# Altium PCB GPS.PcbDoc
Units mil, origin at the board's own origin, x right, y up, seen from the top; angles counter-clockwise.
Board outline 3330 x 1470 mil, 2 copper layers (Top Layer, Bottom Layer); 30 components, 27 nets, 117 pads, 26 vias.
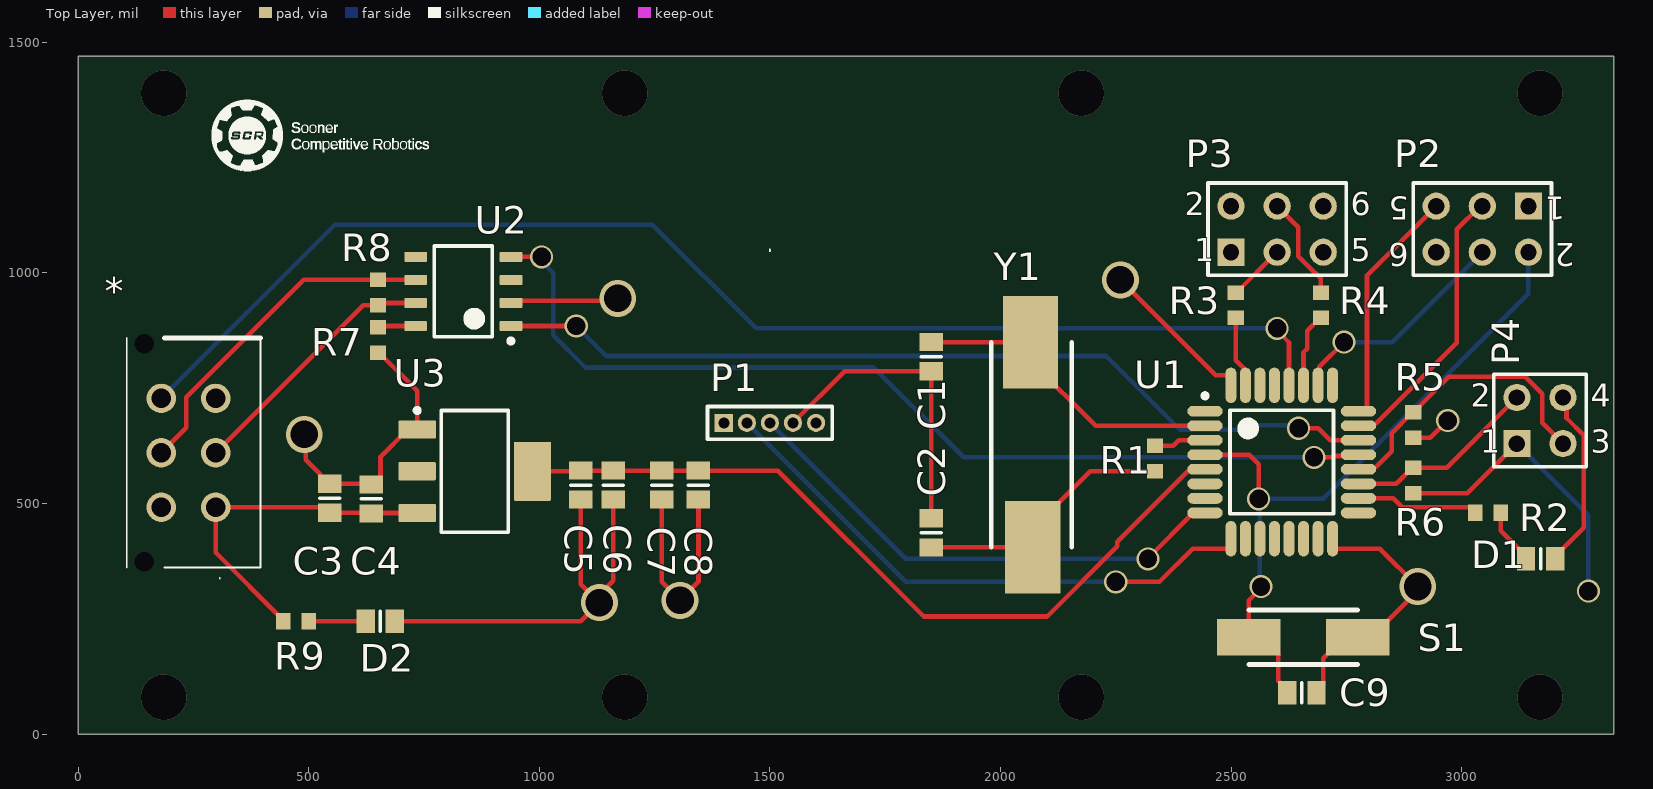
[diagram p0: Top Layer view]
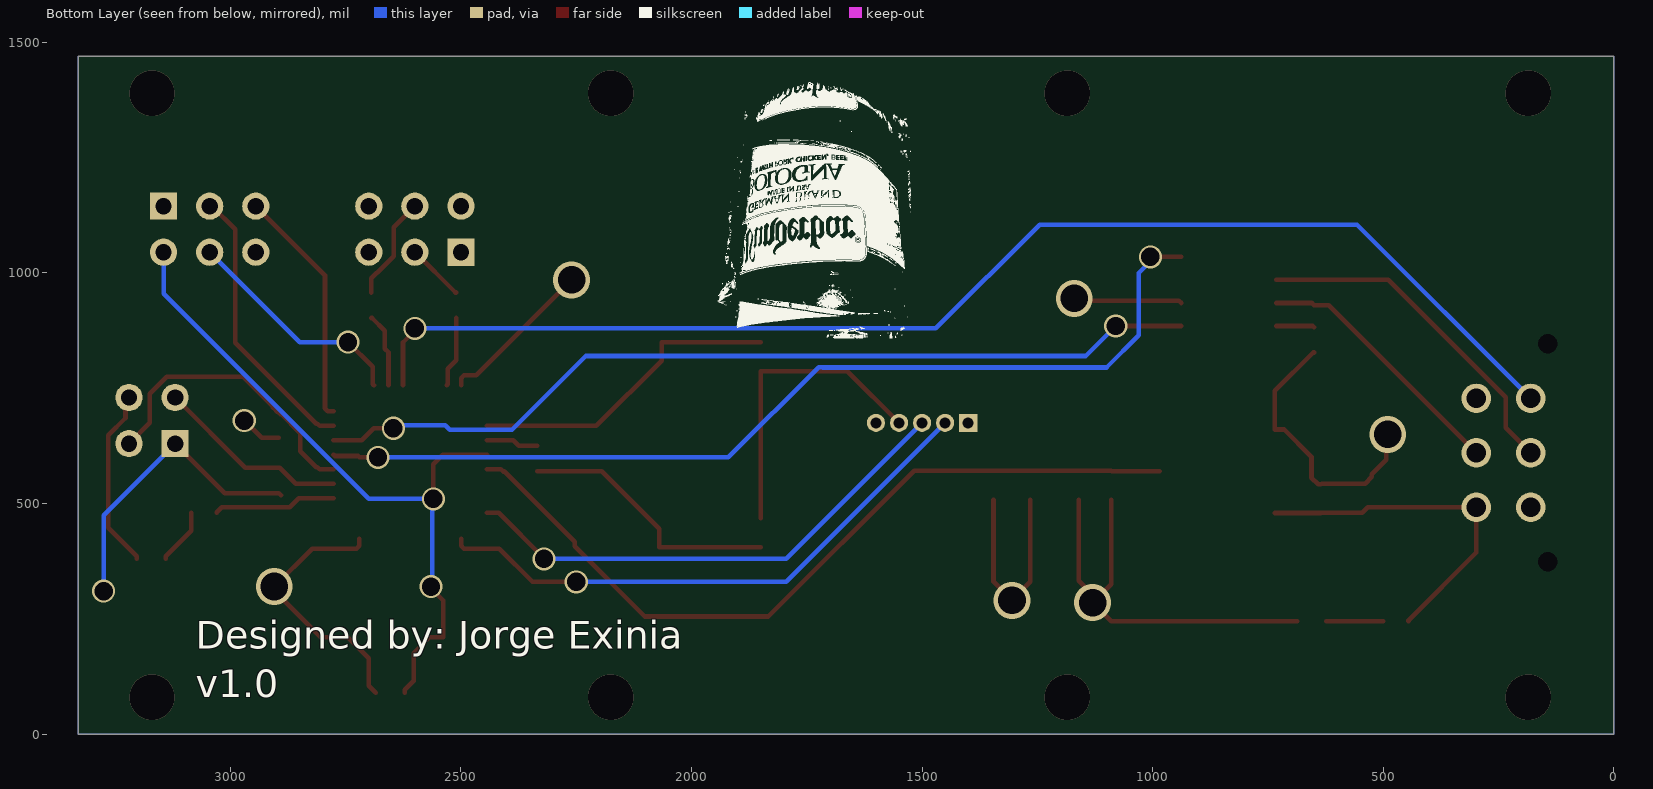
[diagram p1: Bottom Layer view, seen from below]

## Layer stack, top to bottom
Top Solder: solder mask 0.4, Solder Resist, Dk 3.5
Top Layer: signal copper 1.4
Dielectric 1: dielectric 12.6, FR-4, Dk 4.8
Bottom Layer: signal copper 1.4
Bottom Solder: solder mask 0.4, Solder Resist, Dk 3.5

## Board outline
0,0 3330,0 3330,1470 0,1470

## Design rules (kind name [scope] priority, off if disabled: settings)
Clearance [All] p1: gap=10 ignorepadtopadclearanceinfootprint=FALSE except(0: Arc-Hole Track-Hole SMDPad-Hole THPad-Hole Via-Hole Fill-Hole Poly-Hole Region-Hole Text-Hole)
PolygonConnect [All] p1: connectstyle=Relief reliefconductorwidth=10 reliefentries=4 polygonreliefangle="90 Angle" airgapwidth=10
RoutingVias [All] p1: holewidth=28 width=50 viastyle="Through Hole" minholewidth=28 minwidth=50 maxholewidth=28 maxwidth=50
SolderMaskExpansion [All] p1: expansion=4 istentingtop=FALSE
Width [All] p1: maxlimit=10 minlimit=10 preferedwidth=10
30 further rules are at their usual default settings.

## Components (designator, comment, footprint, x,y, rotation, side; value= is the part's Value field where it differs from the comment)
* "Can Molex" "Can Molex-Footprint-1" -451.89,423.11 r90 top
C1 "Cap" 6-0805_L 1850,818.5 r270 top value=50pF
C2 "Cap" 6-0805_L 1850,436.5 r90 top value=50pF
C3 "Cap" 6-0805_L 545,511.5 r270 top value=100nF
C4 "Cap" 6-0805_L 635,510 r270 top value=100uF
C5 "Cap" 6-0805_L 1090,540 r90 top value=330uF
C6 "Cap" 6-0805_L 1160,540 r90 top value=100nF
C7 "Cap" 6-0805_L 1265,540 r90 top value=100nF
C8 "Cap" 6-0805_L 1345,540 r90 top value=100nF
C9 "Cap" 6-0805_L 2653.5,90 r180 top value=0.1UF
D1 "LED1" 6-0805_L 3171.5,380 r0 top
D2 "LED1" 6-0805_L 655,245 r0 top
P1 "MHDR1X5" MHDR1X5 1400,675 r0 top
P2 "MHDR2X3" HDR2X3 3145,1145 r180 top
P3 "2x3 Header" HDR2X3 2500,1045 r0 top
P4 "Header 2X2" HDR2X2 3120,630 r0 top
R1 "Res1" 1608[0603] 2335,597.56 r270 top value=1M
R2 "Res1" 1608[0603] 3057.44,480 r0 top value=510
R3 "Res1" 1608[0603] 2510,930 r270 top value=1K
R4 "Res1" 1608[0603] 2695,930 r270 top value=1K
R5 "Res1" 1608[0603] 2895,670 r90 top value=10k
R6 "Res1" 1608[0603] 2895,550 r270 top value=10k
R7 "Res1" 1608[0603] 650,855 r90 top value=10K
R8 "Res1" 1608[0603] 650,957.56 r270 top value=120
R9 "Res1" 1608[0603] 472.56,245 r0 top value=510
S1 "SW-PB" "Push Switch 3x6x2.5" 2775,210 r180 top
U1 "STM32F334K8T6" STM-LQFP32_M 2610,590 r0 top
U2 "SN65HVD230QDR" D0008A_L 835,960 r180 top
U3 "REG1117-3.3" DCY0004A_M 860,570 r0 top
Y1 "XTAL" "Crystal 11.4 x 4.7 x 4.2 mm" 2105,630 r270 top

## Footprints (in the part's own frame and the unit in brackets; to place one, negate y for a bottom-side part, rotate by r counter-clockwise, add the part's x,y. Pads: shape width x height; smd on the part's side, far side on the other; paste and mask are expansions set on the pad)
6-0805_L [mm] "Chip Resistor, Body 2.0x1.2mm, IPC High Density"
  rect 1x1.3 smd: 1(-0.8,0) 2(0.8,0)
  silkscreen extent 0,-0.55 0,0.55, body extent -1.07,-0.7 1.07,0.7, height 0.7
1608[0603] [mm] "Chip Capacitor, Body 1.6x0.8mm, IPC High Density"
  rect 0.8x0.9 smd: 1(-0.7,0) 2(0.7,0)
  body extent -0.87,-0.48 0.87,0.48, height 1.3
"Can Molex-Footprint-1" [mm]
  round 1.62 hole 1.07: 1(7.747,-19.05) 2(4.747,-19.05) 3(1.747,-19.05) 4(7.747,-16.05) 5(4.747,-16.05) 6(1.747,-16.05)
  round 0.535 hole 1.07 unplated: MH1(10.747,-15.11) MH2(-1.253,-15.11)
  silkscreen extent -2.19,-21.52 11.07,-14.15, body extent -1.77,-21.45 11.38,-12.68, height 9.9
"Crystal 11.4 x 4.7 x 4.2 mm" [mil]
  rect 200x120 smd: 1(-220,-40) 2(225,-35)
  silkscreen extent -220,-125 225,50
D0008A_L [mm] "SOIC, 8-Leads, Body 5x4mm, Pitch 1.27mm, IPC High Density"
  rrect18% 1.25x0.55 smd: 1(-2.625,1.905) 2(-2.625,0.635) 3(-2.625,-0.635) 4(-2.625,-1.905) 5(2.625,-1.905) 6(2.625,-0.635) 7(2.625,0.635) 8(2.625,1.905)
  silkscreen extent -2.75,-2.5 1.6,2.85, body extent -3,-2.45 3,2.45, height 1.63
DCY0004A_M [mm] "SOT223, 4-Leads, Body 6.7x3.7mm, Pitch 2.3mm, IPC Low Density"
  rrect10% 2.05x1 smd: 1(-3.175,2.3) 2(-3.175,0) 3(-3.175,-2.3)
  rrect5% 2.05x3.25 smd: 4(3.175,0)
  silkscreen extent -3.3,-3.35 1.85,3.47, body extent -3.5,-3.25 3.5,3.25, height 1.62
HDR2X2 [mm] "Connector; Header; 2x2 Position"
  rect 1.5x1.5 hole 0.9: 1(0,0)
  round 1.5 hole 0.9: 2(0,2.54) 3(2.54,0) 4(2.54,2.54)
  silkscreen extent -1.27,-1.27 3.81,3.81
HDR2X3 [mm] "Connector; Header; 3x2 Position"
  rect 1.5x1.5 hole 0.9: 1(0,0)
  round 1.5 hole 0.9: 2(0,2.54) 3(2.54,0) 4(2.54,2.54) 5(5.08,0) 6(5.08,2.54)
  silkscreen extent -1.27,-1.27 6.35,3.81
MHDR1X5 [mm] "Connector; Header; 5 Position"
  rect 1x1 hole 0.6: 1(0,0)
  round 1 hole 0.6: 2(1.27,0) 3(2.54,0) 4(3.81,0) 5(5.08,0)
  silkscreen extent -0.9,-0.9 5.98,0.9
"Push Switch 3x6x2.5" [mm]
  rect 3.5x2 smd: 1(0,0) 2(6,0)
  silkscreen extent 0,-1.5 6,1.5
STM-LQFP32_M [mm] "QFP, 32-Leads, Body 7x7mm, Pitch 0.8mm, IPC Low Density"
  oval 1.95x0.6 smd: 1(-4.225,2.8) 2(-4.225,2) 3(-4.225,1.2) 4(-4.225,0.4) 5(-4.225,-0.4) 6(-4.225,-1.2) 7(-4.225,-2) 8(-4.225,-2.8) 17(4.225,-2.8) 18(4.225,-2) 19(4.225,-1.2) 20(4.225,-0.4) 21(4.225,0.4) 22(4.225,1.2) 23(4.225,2) 24(4.225,2.8)
  oval 0.6x1.95 smd: 9(-2.8,-4.225) 10(-2,-4.225) 11(-1.2,-4.225) 12(-0.4,-4.225) 13(0.4,-4.225) 14(1.2,-4.225) 15(2,-4.225) 16(2.8,-4.225) 25(2.8,4.225) 26(2,4.225) 27(1.2,4.225) 28(0.4,4.225) 29(-0.4,4.225) 30(-1.2,4.225) 31(-2,4.225) 32(-2.8,4.225)
  silkscreen extent -4.35,-2.85 2.85,3.77, body extent -3.5,-3.5 3.5,3.5, height 1.6

## Part data
*: library part CMP-001-0001-2, "can molex for IGVC", Datasheet=https://www.mouser.com/datasheet/2/276/0430450612_PCB_HEADERS-142990.pdf, Mouser=https://www.mouser.com/ProductDetail/Molex/43045-0612?qs=KC2ywxza1kqWo9LLJ5Lh3w%3D%3D
C1 C2 C3 C4 C5 C6 C7 C8 C9: "Capacitor", LatestRevisionDate=17-Jul-2002, LatestRevisionNote="Re-released for DXP Platform.", PackageDescription="Radial Cap, Thru-Hole; 2 Leads; 0.3 in Pin Spacing", PackageReference=RAD-0.3, Published=8-Jun-2000, Publisher="Altium Limited"
D1 D2: "Typical RED GaAs LED", LatestRevisionDate=08-Jul-2005, LatestRevisionNote="Mech Layer 1 removed.", PackageDescription="LED; 2 Leads", PackageReference=LED-1, Published=8-Jun-2000, Publisher="Altium Limited"
P1: "Header, 5-Pin", LatestRevisionDate=17-Jul-2002, LatestRevisionNote="Re-released for DXP Platform.", Publisher="Altium Limited"
P2: "Header, 3-Pin, Dual row", LatestRevisionDate=17-Jul-2002, LatestRevisionNote="Re-released for DXP Platform.", Publisher="Altium Limited"
P4: "Header, 2-Pin, Dual row", LatestRevisionDate=17-Jul-2002, LatestRevisionNote="Re-released for DXP Platform.", Publisher="Altium Limited"
R1 R2 R3 R4 R5 R6 R7 R8 R9: "Resistor", LatestRevisionDate=17-Jul-2002, LatestRevisionNote="Re-released for DXP Platform.", PackageDescription="Axial Device, Thru-Hole; 2 Leads; 0.3 in Pin Spacing", PackageReference=AXIAL-0.3, Published=8-Jun-2000, Publisher="Altium Limited"
S1: "Switch", LatestRevisionDate=17-Jul-2002, LatestRevisionNote="Re-released for DXP Platform.", PackageDescription="Switch; 2 Leads", PackageReference=SPST-2, Published=24-Mar-1999, Publisher="Altium Limited"
U1: library part CMP-0537-00074-1, "ARM Cortex-M4 32-bit MCU, 64 KB Flash, 16 KB Internal RAM, 25 I/Os, 32-Pin LQFP, -40 to 85 degC, Tray", I/Os (High Current)=25, Operating Frequency(F) (Processor speed) (MHz)=72, Package Description="32-Pin Low Profile Quad Flat Package, 7 x 7 mm Body, 0.8 mm Pitch", Package Reference=LQFP32, Supply Voltage(Vcc) min (V)=2, ComponentLink1Description="Manufacturer URL", ComponentLink1URL=http://www.st.com/, ComponentLink2Description=Datasheet, ComponentLink2URL=http://www.st.com/st-web-ui/static/active/en/resource/technical/document/datasheet/DM00097745.pdf, Core="ARM Cortex-M4", D/A Converter=3, DatasheetVersion="Rev. 4", FLASH Size (Prog) (kB)=64, Internal RAM Size (kB)=16, Mounting Technology="Surface Mount", Packing=Tray
U2: library part CMP-0315-00033-2, "Automotive Catalog 3.3 V CAN Transceiver, 17 mA, 3.3 V, -40 to 125 degC, 8-pin SOIC (D), Green (RoHS & no Sb/Br)", Drivers Per Package=1, Manufacturer="Texas Instruments", Rating=Catalog, Supply Voltage(s)(V)=3.3, Code_JEDEC=MS-012AA, ComponentLink1Description=Datasheet, ComponentLink1URL=http://www.ti.com/lit/ds/symlink/sn65hvd230.pdf, DatasheetVersion=SLOS346K, Eco-Plan="Green (RoHS & no Sb/Br)", ICC(Max)(mA)=17, Isolated=No, Mounting Technology="Surface Mount", PackageDescription="8-Pin Plastic Small Outline Integrated Circuit, 4.9 x 3.9 mm, Pitch 1.27 mm Pitch", PackageReference=D0008A, PackageVersion="revM, Jun-2011", PartNumber=SN65HVD230QDR, Receivers Per Package=1, SubFamily=CAN, Transient Pulse Protection(V)="-25 to 25"
U3: library part CMP-0395-00549-2, "Single Output LDO, 800 mA, Fixed 3.3 V Output, 3.8 to 15 V Input, with Internal Current Limiting, 4-pin SOT-223 (DCY), -40 to 125 degC, Green (RoHS & no Sb/Br)", Manufacturer="Texas Instruments", Rating=Catalog, Code_JEDEC=TO-261, ComponentLink1Description="Manufacturer URL", ComponentLink1URL=http://www.ti.com/, ComponentLink2Description=Datasheet, ComponentLink2URL=http://www.ti.com/general/docs/lit/getliterature.tsp?genericPartNumber=REG1117-33&fileType=pdf, ComponentLink3Description="Package Specification", ComponentLink3URL=http://www.ti.com/litv/pdf/mpds094a, DatasheetVersion=SBVS001D, Eco-Plan="Green (RoHS & no Sb/Br)", Fixed Output Options(V)=5, Iout(Max)(A)=0.8, Iq(Typ)(mA)=4, Mounting Technology="Surface Mount", PackageDescription="4-Pin Plastic Small Outline, Body 3.5 x 6.5 mm, Pitch 2.3 mm", PackageReference=DCY0004A, PackageVersion=4202506/B, PartNumber=REG1117-3.3, SubFamily="Single Channel LDO", Vdo(Typ)(mV)=1100, Vin(Max)(V)=15, Vin(Min)(V)=3.8, Vout Adj(Max)(V)=3.3, Vout Adj(Min)(V)=3.3
Y1: "Crystal Oscillator", LatestRevisionDate=17-Jul-2002, LatestRevisionNote="Re-released for DXP Platform.", PackageDescription="Crystal, Thru-Hole; 2 Leads; Body 3.1 x 8.2 mm (Dia.xH)", PackageReference=R38, Published=8-Jun-2000, Publisher="Altium Limited"

## Via types
v1: diameter 50, hole 40, Top Layer to Bottom Layer, 12 vias
v2: diameter 98.5, hole 98.5, Top Layer to Bottom Layer, 8 vias
v3: diameter 80, hole 60, Top Layer to Bottom Layer, 6 vias

## Nets (pads, with @x,y where several pads share a name; then routed paths per layer and width w, separated by ;. In a path a pad name is that pad's centre, name@x,y a point inside that pad or via, vN(x,y) a via of type N, cw(c..) or ccw(c..) an arc to the next point about the centre after c; other vN are vias at no path point)
+5: *.3 C3.2 C4.2 R9.1 U3.3 | length 750.6
  Top Layer w10: R9.1 445,246.97 298.11,393.86 *.3 533.11,491.89 C3.2 633.5,480 C4.2 635.94,479.45 U3.3
BOOT0: R3.2 U1.31 | length 154.9
  Top Layer w10: R3.2 2510,810.59 2528.65,791.94 2528.65,758.95 U1.31
BOOT1: R4.2 U1.27 | length 162.9
  Top Layer w10: U1.27 2657.24,827.93 2665,835.69 2665,874.41 2693.03,902.44 R4.2
CAN_RX: U1.21 U2.4 | length 2106.2
  Top Layer w10: U2.4 v1(1005,1035) ; v1(2680,600) 2720,600 2723.14,603.14 2773.73,603.14 U1.21
  Bottom Layer w10: v1(1005,1035) 1005,1025 1030,1000 1030,865 1100,795 1715,795 1715.86,795.86 1724.14,795.86 1920,600 v1(2680,600)
CAN_TX: U1.22 U2.1 | length 1948.9
  Top Layer w10: U2.1 v1(1080,885) ; v1(2646.72,663.28) 2688.79,663.28 2714.83,637.24 U1.22
  Bottom Layer w10: v1(1080,885) 1145,820 2229.38,820 2389.38,660 2524.28,660 2534.28,670 2640,670 v1(2646.72,663.28)
CANH: *.2 R8.2 U2.7 | length 568.2
  Top Layer w10: *.2 618.11,930 R8.2 655,935 U2.7
CANL: *.5 R8.1 U2.6 | length 745.9
  Top Layer w10: *.5 234.49,664.49 234.49,730.8 488.81,985.12 R8.1 650.12,985 U2.6
ESTOP_SIG: *.4 U1.28 | length 2803.6
  Top Layer w10: v1(2600,880) 2600,874.93 2625.75,849.18 U1.28
  Bottom Layer w10: *.4 556.89,1105 1245,1105 1470,880 v1(2600,880)
GND: *.6 C1.2 C2.2 C3.1 C4.1 C5.1 C6.1 C7.1 C8.1 C9.1 D1.2 D2.2 P1.4 P2.6 P3.5 P3.6 P4.4 R5.1 R7.1 S1.1 U1.16 U1.32 U2.2 U3.1 | length 4330.9
  Top Layer w10: v3(490,650) 492.99,647.01 492.99,595 524.41,563.58 524.41,557.68 539.09,542.99 C3.1 633.5,542.99 C4.1 640.91,541.5 655.59,556.18 655.59,601.81 714.33,660.55 U3.1 735,744.41 651.97,827.44 R7.1 ; D2.2 1090,245 v3(1130,285) ; U2.2 943.35,940 1165,940 v3(1170,945) ; C5.1 1090,325 v3(1130,285) ; C6.1 1160,332.78 1130,302.78 v3(1130,285) ; C7.1 1265,330 v3(1305,290) 1345,330 C8.1 ; P1.4 1662.01,787.01 C1.2 C2.2 ; v3(2260,985) 2467.09,777.91 2493.47,777.91 2499.76,771.62 U1.32 ; C9.1 2699.69,104.69 2699.69,164.21 2745.47,210 S1.1 2804.53,210 2905,310.47 v3(2905,320) 2822.91,402.09 2726.53,402.09 2720.24,408.38 U1.16 ; R5.1 2932.44,642.44 v1(2970,680) ; D1.2 3202.99,385.91 3264.53,447.44 3264.53,648.44 3227.5,685.47 3227.5,722.5 P4.4
GPSRX: P1.2 U1.9 | length 1240.4
  Top Layer w10: v1(2250,330) 2344.91,330 2416.99,402.09 2493.47,402.09 2499.76,408.38 U1.9
  Bottom Layer w10: P1.2 1795,330 v1(2250,330)
GPSTX: P1.3 U1.8 | length 1108
  Top Layer w10: v1(2320,380) 2320,381.34 2418.43,479.76 U1.8
  Bottom Layer w10: P1.3 1795,380 v1(2320,380)
NetC1_1: C1.1 U1.2 Y1.1 | length 692.2
  Top Layer w10: C1.1 Y1.1 2065,810 2206.26,668.74 U1.2
NetC2_1: C2.1 R1.2 Y1.2 | length 576.8
  Top Layer w10: C2.1 Y1.2 2070,445 2195,570 R1.2
NetD1_1: D1.1 R2.2 | length 122.8
  Top Layer w10: R2.2 3085,440.91 3140,385.91 D1.1
NetD2_1: D2.1 R9.2 | length 123.4
  Top Layer w10: R9.2 D2.1
NetP3_3: P3.3 R3.1 | length 126.2
  Top Layer w10: R3.1 2511.97,957.56 2599.41,1045 P3.3
NetP3_4: P3.4 R4.1 | length 227.5
  Top Layer w10: P3.4 2645.47,1099.53 2645.47,1036.56 2681.56,1000.47 2682.83,1000.47 2695,988.31 R4.1
NetR1_1: R1.1 U1.3 | length 113.7
  Top Layer w10: R1.1 2374.5,625.12 2386.62,637.24 U1.3
NetR7_2: R7.2 U2.8 | length 82.7
  Top Layer w10: R7.2 652.44,885 U2.8
NRST: C9.2 P2.2 S1.2 U1.4 | length 1544
  Top Layer w10: U1.4 2444.04,605.37 2539.63,605.37 2560,585 v1(2560,510) ; v1(2565,320) 2565,315.87 2538.78,289.65 S1.2 2568.31,210 2602.68,175.63 2602.68,115.24 2622.01,95.91 C9.2
  Bottom Layer w10: v1(2565,320) 2562.5,322.5 2562.5,507.5 v1(2560,510) 2700,510 3145,955 P2.2
PA8: R2.1 U1.18 | length 267
  Top Layer w10: U1.18 2851.5,511.26 2871.07,491.69 3019.13,491.69 3029.88,480.94 R2.1
PA9: P4.2 R6.1 U1.19 | length 421.2
  Top Layer w10: U1.19 2858.23,542.76 2893.03,577.56 R6.1 2967.56,577.56 P4.2
PA10: P4.3 R5.2 U1.20 | length 647.7
  Top Layer w10: U1.20 2806.6,574.25 2811.28,578.94 2814.02,578.94 2848.15,613.07 2848.15,652.68 2889.72,694.25 2891.69,694.25 R5.2 2896.97,697.56 2907.72,708.31 2907.72,710.28 2971.97,774.53 3138.44,774.53 3174.53,738.44 3174.53,675.47 P4.3
PA13: P2.3 U1.23 | length 609.8
  Top Layer w10: U1.23 2806.6,668.74 2811.28,673.43 2814.02,673.43 2989.53,848.93 2989.53,1094.53 3040,1145 P2.3
PA14: P2.5 U1.24 | length 521.9
  Top Layer w10: U1.24 2788.71,700.24 2795,706.53 2795,995 P2.5
PB3: P2.4 U1.26 | length 497.7
  Top Layer w10: U1.26 2691.35,758.95 2691.35,796.35 v1(2745,850)
  Bottom Layer w10: v1(2745,850) 2850,850 P2.4
VCC: C5.2 C6.2 C7.2 C8.2 P1.5 P2.1 P3.1 P3.2 P4.1 R6.2 U1.1 U1.5 U1.17 U2.3 U3.2 U3.4 | length 2388.8
  Top Layer w10: U3.4 1088.5,570 C5.2 C6.2 C7.2 C8.2 1517.05,571.5 1833.54,255 2101.21,255 2253.6,407.38 2253.6,417.18 2405.98,569.57 2408.72,569.57 2413.4,574.25 U1.5 ; R6.2@2890.24,517.68 R6.2 3012.44,522.44 P4.1
  Bottom Layer w10: P4.1 3275,475 v1(3275,310)
pads on no net: *.1 *.MH1 *.MH2 P1.1 U1.6 U1.7 U1.10 U1.11 U1.12 U1.13 U1.14 U1.15 U1.25 U1.29 U1.30 U2.5
copper on no net:
  other v2: 185,80 1185,80 2175,80 3170,80 185,1390 1185,1390 2175,1390 3170,1390

## Polygon pours and split planes (outlines as drawn)
GND on Bottom Layer "GNDBOTTOM" (solid, shelved, pour order 1): 0,0 3330,0 3330,1470 0,1470
VCC on Top Layer "VCCTOP" (solid, shelved, pour order 0): 0,0 3330,0 3330,1470 0,1470

## Silkscreen, mask and mechanical layers (free items; w line width, h text height)
Top Overlay:
  drawing of 40 lines, arcs and shapes, not listed
Bottom Overlay:
  drawing of 853 lines, arcs and shapes, not listed
  text "Designed by: Jorge Exinia" at 3075,184.99 h60
  text "v1.0" at 3075,80 h60
Mechanical 13:
  the board outline again, w10
Mechanical 15:
  the board outline again, w10

## Text inside footprints (layer, text, board x,y; h text height)
P2: Top Overlay "6" at 2885,1065 h50 r180; Top Overlay "5" at 2885,1165 h50 r180; Top Overlay "2" at 3245,1065 h50 r180; Top Overlay "1" at 3225,1165 h50 r180
P3: Top Overlay "6" at 2760,1125 h50; Top Overlay "5" at 2760,1025 h50; Top Overlay "2" at 2400,1125 h50; Top Overlay "1" at 2420,1025 h50
P4: Top Overlay "3" at 3280,610 h50; Top Overlay "4" at 3280,710 h50; Top Overlay "2" at 3020,710 h50; Top Overlay "1" at 3040,610 h50